# Altium PCB Main.PcbDoc
Units mil, origin at the board's own origin, x right, y up, seen from the top; angles counter-clockwise.
Board outline 2170 x 3350 mil, 2 copper layers (Top Layer, Bottom Layer); 11 components, 45 nets, 71 pads, 0 vias.
Unrouted connection lines stored in the file: 1.
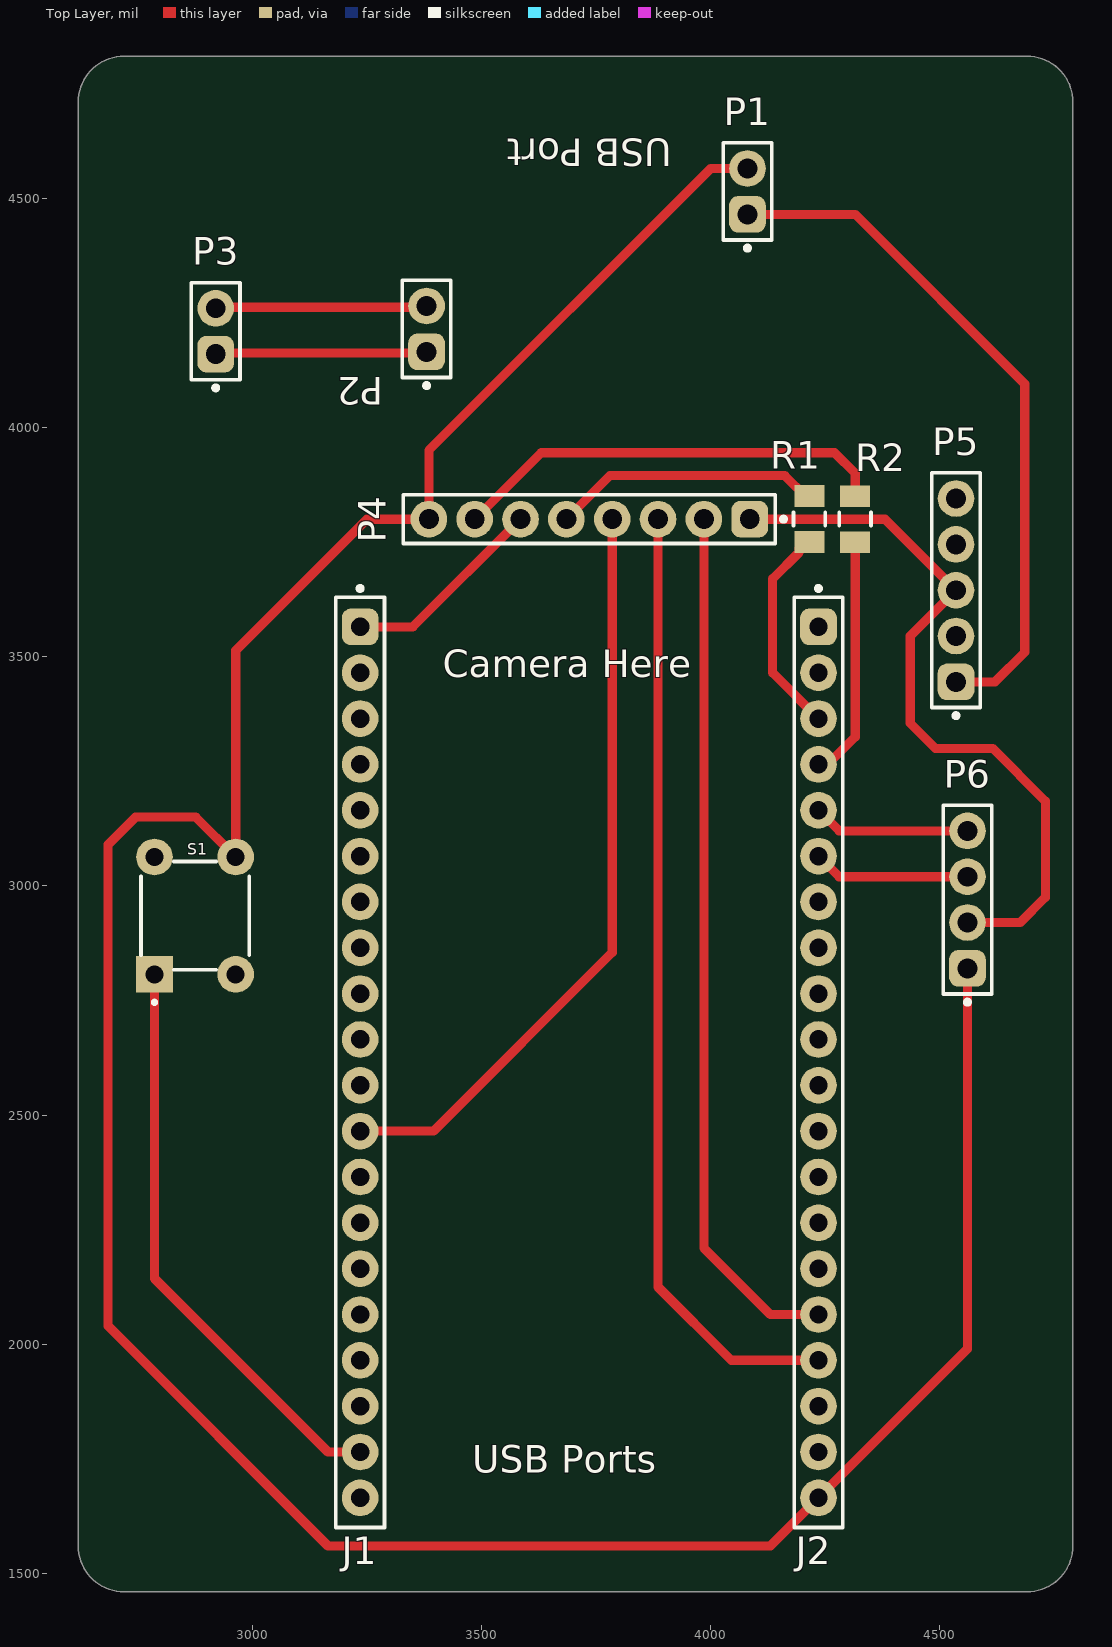
[diagram p0: Top Layer view]
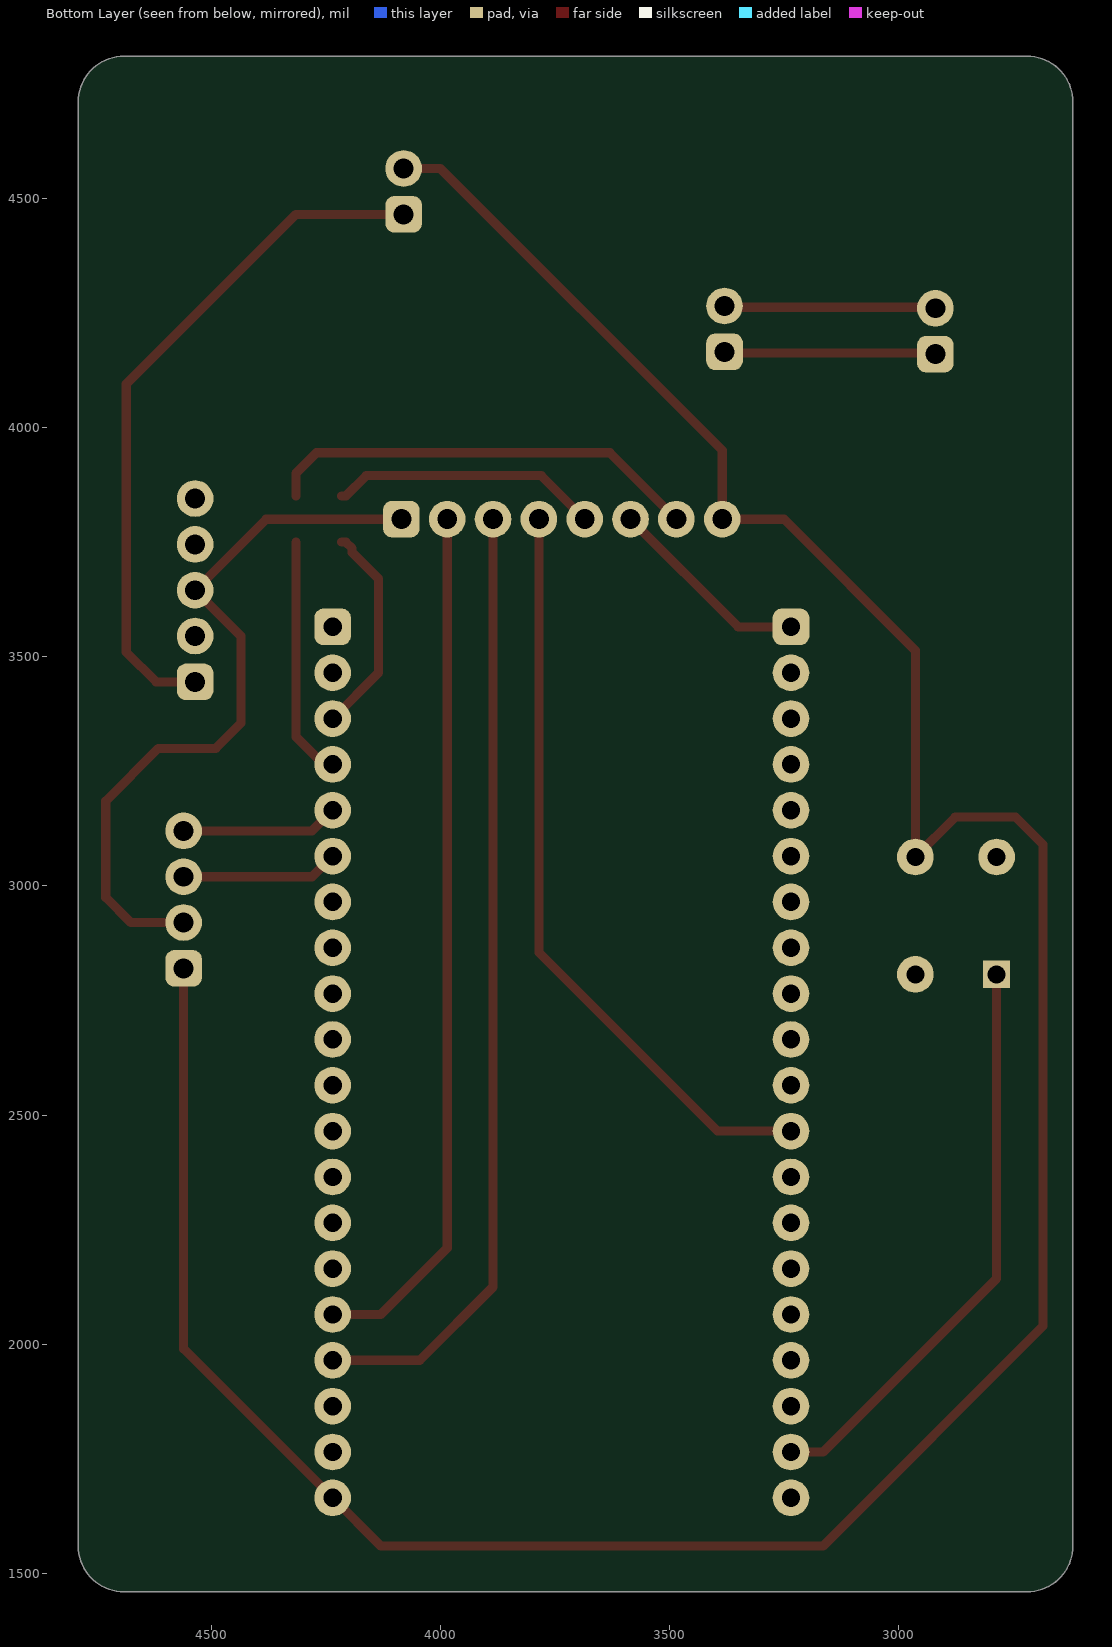
[diagram p1: Bottom Layer view, seen from below]
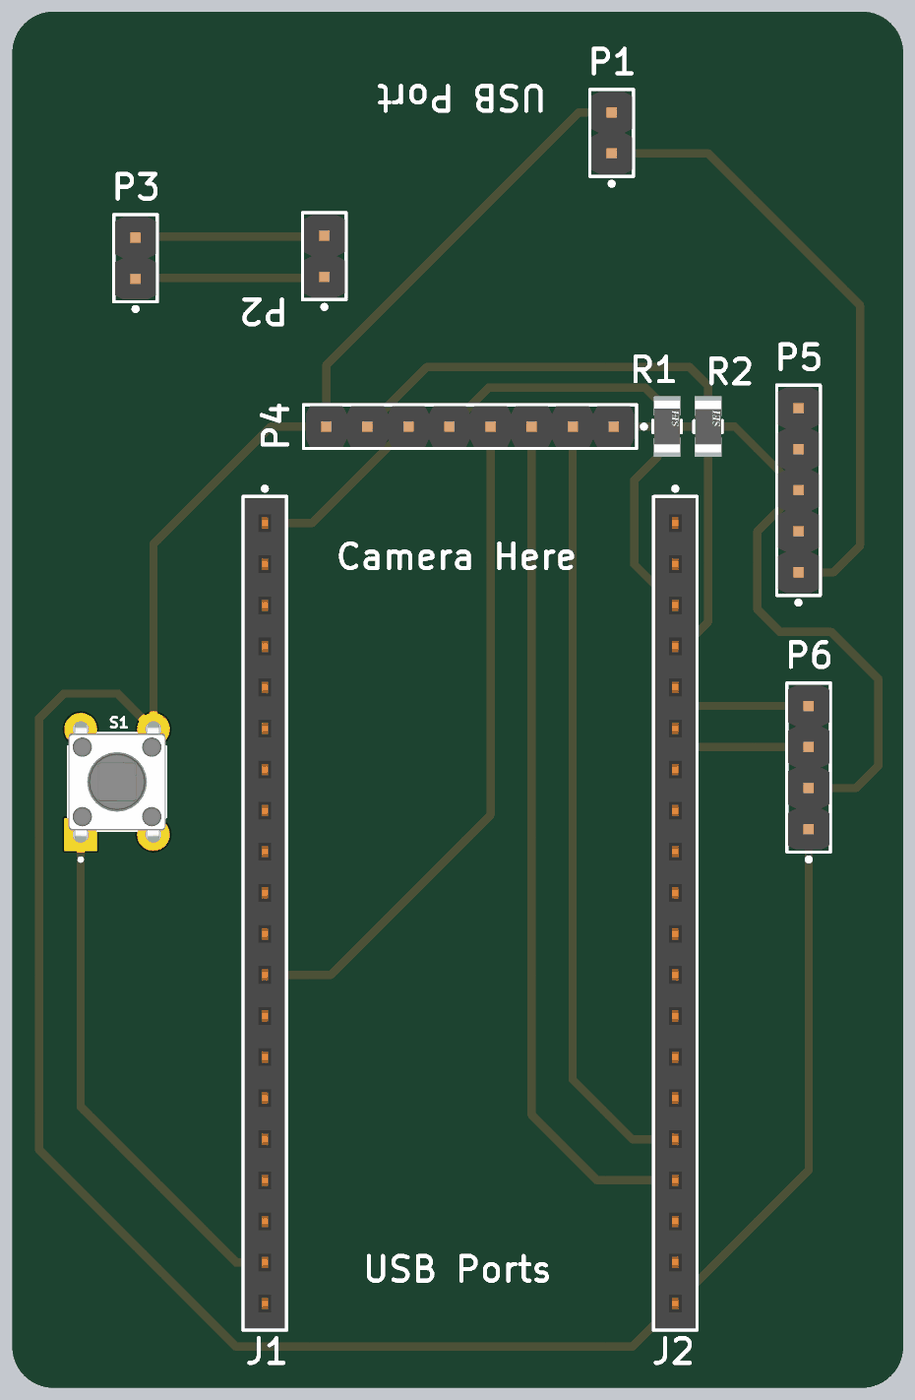
[diagram p2: 3D render of the assembled board from above, using the file's embedded part models]

## Layer stack, top to bottom
Top Solder: solder mask 0.4, Solder Resist, Dk 3.5
Top Layer: signal copper 1.4
Dielectric 1: dielectric 12.6, FR-4, Dk 4.8
Bottom Layer: signal copper 1.4
Bottom Solder: solder mask 0.4, Solder Resist, Dk 3.5

## Board outline
2620,1560 2620,4710 cw(c2720,4710) 2720,4810 4690,4810 cw(c4690,4710) 4790,4710 4790,1560 cw(c4690,1560) 4690,1460 2720,1460 cw(c2720,1560)

## Design rules (kind name [scope] priority, off if disabled: settings)
Clearance [All] p1: gap=10 ignorepadtopadclearanceinfootprint=FALSE
PolygonConnect [All] p1: connectstyle=Relief reliefconductorwidth=10 reliefentries=4 polygonreliefangle="90 Angle" airgapwidth=10
RoutingVias [All] p1: holewidth=28 width=50 viastyle="Through Hole" minholewidth=28 minwidth=50 maxholewidth=28 maxwidth=50
SolderMaskExpansion [All] p1: expansion=4 istentingtop=FALSE
SupplyNets "Schematic Supply Nets" [InNet('3V3_Pre')] p1: voltage=0.000
SupplyNets "Schematic Supply Nets_3" [InNet('RES')] p2: voltage=0.000
SupplyNets "Schematic Supply Nets_2" [InNet('GND')] p3: voltage=0.000
SupplyNets "Schematic Supply Nets_1" [InNet('5V0')] p4: voltage=0.000
Width [All] p1: maxlimit=20 minlimit=20 preferedwidth=20 minimp=50.000000 maximp=50.000000 favimp=50.000000
30 further rules are at their usual default settings.

## Classes and differential pairs
component class Main: J1 J2 P1 P2 P5 P6 R1 R2 S1

## Components (designator, comment, footprint, x,y, rotation, side; value= is the part's Value field where it differs from the comment)
J1 "61302011821" 61302011821 3235,2615 r270 top
J2 "61302011821" 61302011821 4235,2615 r270 top
P1 "61300211121" 61300211121 4080,4515 r90 top
P2 "61300211121" 61300211121 3380,4215 r90 top
P3 "61300211121" 61300211121 2920,4210 r90 top
P4 "61300811121" 61300811121 3735,3800 r180 top
P5 "61300511121" 61300511121 4535,3645 r90 top
P6 "61300411121" 61300411121 4560,2970 r90 top
R1 "0" FP-RMCF1206-IPC_C 4215,3800.22 r90 top
R2 "0" FP-RMCF1206-IPC_C 4315,3800 r90 top
S1 "SWT0325-073016TSK_REVA" SW_SWT0325-073016TSK_REVA 2875,2935 r90 top

## Footprints (in the part's own frame and the unit in brackets; to place one, negate y for a bottom-side part, rotate by r counter-clockwise, add the part's x,y. Pads: shape width x height; smd on the part's side, far side on the other; paste and mask are expansions set on the pad)
61300211121 [mil] "Pin Header, pitch 2.54 mm, THT, Vertical, single row, 2p"
  rrect50% 80x80 hole 43.31: 1(-50,0)
  round 80 hole 43.31: 2(50,0)
  silkscreen extent -129,-53 106,53, body extent -100,-50 100,50, height 337
61300411121 [mil] "Pin Header, pitch 2.54 mm, THT, Vertical, single row, 4p"
  rrect50% 80x80 hole 43.31: 1(-150,0)
  round 80 hole 43.31: 2(-50,0) 3(50,0) 4(150,0)
  silkscreen extent -229,-53 206,53, body extent -200,-50 200,50, height 337
61300511121 [mil] "Pin Header, pitch 2.54 mm, THT, Vertical, single row, 5p"
  rrect50% 80x80 hole 43.31: 1(-200,0)
  round 80 hole 43.31: 2(-100,0) 3(0,0) 4(100,0) 5(200,0)
  silkscreen extent -279,-53 256,53, body extent -250,-50 250,50, height 337
61300811121 [mil] "Pin Header, pitch 2.54 mm, THT, Vertical, single row, 8p"
  rrect50% 80x80 hole 43.31: 1(-350,0)
  round 80 hole 43.31: 2(-250,0) 3(-150,0) 4(-50,0) 5(50,0) 6(150,0) 7(250,0) 8(350,0)
  silkscreen extent -429,-53 406,53, body extent -400,-50 400,50, height 337
61302011821 [mil] "Socket Header, Pitch 2.54 mm, THT, Vertical, single row, 20p"
  rrect50% 80x80 hole 40.16: 1(-950,0)
  round 80 hole 40.16: 2(-850,0) 3(-750,0) 4(-650,0) 5(-550,0) 6(-450,0) 7(-350,0) 8(-250,0) 9(-150,0) 10(-50,0) 11(50,0) 12(150,0) 13(250,0) 14(350,0) 15(450,0) 16(550,0) 17(650,0) 18(750,0) 19(850,0) 20(950,0)
  silkscreen extent -1039,-53 1015,53, body extent -1010,-49 1010,49, height 337
FP-RMCF1206-IPC_C [mil]
  rect 47.39x65.28 smd paste+0 mask+0: 1(-50.22,0) 2(50.22,0)
  silkscreen extent -15,-34 15,34, body extent -78,-38 78,38, height 10
SW_SWT0325-073016TSK_REVA [mm]
  rect 2.032x2.032 / inner round 1.508 / far side rect 1.508x1.508 hole 1 mask+0.102: 1(-3.25,2.25)
  round 2.032 hole 1 mask+0.102: 2(3.25,2.25) 3(-3.25,-2.25) 4(3.25,-2.25)
  silkscreen extent -4.9,-3 3,3, body extent -3.95,-3 3.95,3, height 7.3

## Part data
J1 J2: library part CMP-1502-01348-4, "THT Vertical Socket Header WR-PHD, Pitch 2.54 mm, Single Row, 20 pins", Contact Resistance=20mΩ, Current Rating=3A, Operating Supply Voltage=250V, Gender=Female, Lead Pitch=2.54mm, Number of Pins=20, Orientation=Vertical
P1 P2 P3: library part CMP-1712-00002-7, "THT Vertical Pin Header WR-PHD, Pitch 2.54 mm, Single Row, 2 pins", Color=Black, Contact Resistance=20mΩ, Current Rating=3A, Max Operating Temperature=105°C, Min Operating Temperature=-40°C, Operating Supply Voltage=250V, Connector Type="Male Pin", Contact Gender=Male, Contact Material=Gold, Contact Mating Length=5.9944mm, Contact Plating=Gold, Gender=Male, Height=8.94mm, Housing Material=PBT, Lead Free="Lead Free", Lead Pitch=2.54mm, Mount="Through Hole", Number of Contacts=2, Number of Pins=2, Number of Positions=2, Number of Rows=1, Orientation=Vertical, Packaging=Bulk, Pitch=2.54mm, REACH SVHC=No, RoHS=Compliant, Termination="Through Hole", Voltage Rating=250V
P4: library part CMP-1502-01076-4, "THT Vertical Pin Header WR-PHD, Pitch 2.54 mm, Single Row, 8 pins", Color=Black, Contact Resistance=20mΩ, Current Rating=3A, Max Operating Temperature=105°C, Min Operating Temperature=-40°C, Operating Supply Voltage=250V, Connector Type="Male Pin", Contact Material=Gold, Contact Mating Length=5.9944mm, Contact Plating=Gold, Gender=Male, Height=8.54mm, Lead Pitch=2.54mm, Mount="Through Hole", Number of Contacts=8, Number of Pins=8, Number of Positions=8, Number of Rows=1, Orientation=Vertical, Packaging=Bulk, Pitch=2.54mm, RoHS=Compliant, Termination=Solder, Voltage Rating=250V
P5: library part CMP-1502-01068-4, "THT Vertical Pin Header WR-PHD, Pitch 2.54 mm, Single Row, 5 pins", Color=Black, Contact Resistance=20mΩ, Current Rating=3A, Max Operating Temperature=105°C, Min Operating Temperature=-40°C, Operating Supply Voltage=250V, Connector Type="Male Pin", Contact Material=Gold, Contact Mating Length=5.9944mm, Contact Plating=Gold, Gender=Male, Height=8.89mm, Lead Free="Lead Free", Lead Pitch=2.54mm, Mount="Through Hole", Number of Contacts=5, Number of Pins=5, Number of Positions=5, Number of Rows=1, Orientation=Vertical, Packaging=Bulk, Pitch=2.54mm, RoHS=Compliant, Termination=Solder, Voltage Rating=250V
P6: library part CMP-1502-01064-4, "THT Vertical Pin Header WR-PHD, Pitch 2.54 mm, Single Row, 4 pins", Color=Black, Contact Resistance=20mΩ, Current Rating=3A, Max Operating Temperature=105°C, Min Operating Temperature=-40°C, Operating Supply Voltage=250V, Connector Type="Male Pin", Contact Material=Gold, Contact Mating Length=5.9944mm, Contact Plating=Gold, Gender=Male, Height=8.89mm, Lead Free="Lead Free", Lead Pitch=2.54mm, Mount="Through Hole", Number of Contacts=4, Number of Pins=4, Number of Positions=4, Number of Rows=1, Orientation=Vertical, Packaging=Bulk, Pitch=2.54mm, RoHS=Compliant, Termination=Solder, Voltage Rating=250V
R1 R2: library part CMP-26527-003312-1, "2.21kΩ ±1% 0.25W 1206 Thick Film Chip Resistor AEC-Q200 compliant", Case/Package=1206, Max Operating Temperature=155°C, Max Power Dissipation=250mW, Min Operating Temperature=-55°C, Package Quantity=10000, Resistance=2.21kR, Resistor Type="Thick Film", Temperature Coefficient=100ppm/°C, Tolerance=1%, Features="Automotive AEC-Q200", Height=0.028inch, Length=0.126inch, Mount="Surface Mount", Number of Terminations=2, Packaging="Tape and Reel", RoHS Compliant=Yes, Series=RMCF, Width=0.063inch
S1: "6mm x 6mm Through Hole Tactile Switch", Package=None, Check_prices=https://www.snapeda.com/parts/SWT0325-073016TSK/Global+Connector+Technology/view-part/?ref=eda, MF="Global Connector Technology", MP=SWT0325-073016TSK, SnapEDA_Link=https://www.snapeda.com/parts/SWT0325-073016TSK/Global+Connector+Technology/view-part/?ref=snap

## Nets (pads, with @x,y where several pads share a name; then routed paths per layer and width w, separated by ;. In a path a pad name is that pad's centre, name@x,y a point inside that pad or via, vN(x,y) a via of type N, cw(c..) or ccw(c..) an arc to the next point about the centre after c; other vN are vias at no path point)
3V3_Pre: P1.1 P5.1 | length 1520.2
  Top Layer w20: P1.1 4315,4465 4685,4095 4685,3510 4620,3445 P5.1
5V0: J1.20
B+: P2.1 P3.1 | length 462.1
  Top Layer w20: P3.1 2922.5,4162.5 3377.5,4162.5 P2.1
B-: P2.2 P3.2 | length 462.1
  Top Layer w20: P3.2 2922.5,4262.5 3377.5,4262.5 P2.2
BOOT: J2.13
CAM_HREF: J1.6
CAM_PCLK: J1.18
CAM_SIOC: J1.4
CAM_SIOD: J1.3
CAM_VYSNC: J1.5
CAM_XCLK: J1.7
CAM_Y2: J1.16
CAM_Y3: J1.14
CAM_Y4: J1.11
CAM_Y5: J1.15
CAM_Y6: J1.17
CAM_Y7: J1.10
CAM_Y8: J1.9
CAM_Y9: J1.8
D+: J2.19
D-: J2.18
DISP_BKL: J2.4 R2.1 | length 529.6
  Top Layer w20: J2.4 4242.62,3272.62 4262.62,3272.62 4315,3325 R2.1
DISP_CS: J1.12 P4.4 | length 1656.5
  Top Layer w20: J1.12 3395,2465 3785,2855 P4.4
DISP_DC: J2.3 R1.1 | length 464.8
  Top Layer w20: R1.1 4206.05,3750 4192.36,3736.3 4192.36,3727.36 4135,3670 4135,3465 J2.3
DISP_MOSI: J2.16 P4.2 | length 1900.1
  Top Layer w20: P4.2 3985,2210 4130,2065 J2.16
DISP_SCLK: J2.17 P4.3 | length 2091.3
  Top Layer w20: P4.3 3885,2125 4045,1965 J2.17
GND: J2.20 P1.2 P4.8 P6.1 S1.4 | length 6561.9
  Top Layer w20: P1.2 4000,4565 3385,3950 P4.8 3250,3800 2963.58,3513.58 S1.4 2876.54,3150 2745,3150 2685,3090 2685,2040 3165,1560 4130,1560 J2.20 4560,1990 P6.1
LOG: J1.13
NetP4_5: P4.5 R1.2 | length 587.8
  Top Layer w20: P4.5 3780,3895 4161.5,3895 4206.05,3850.44 R1.2
NetP4_7: P4.7 R2.2 | length 958.5
  Top Layer w20: P4.7 3630,3945 4270,3945 4315,3900 R2.2
PSRAM_35: J2.12
PSRAM_36: J2.11
PSRAM_37: J2.10
RES: J1.1 P4.1 P4.6 P5.3 P6.2 | length 2059.8
  Top Layer w20: J1.1 3350,3565 P4.6 ; P4.1 4380,3800 P5.3 ; P5.3@4534.02,3644.02 4435,3545 4435,3355 4490,3300 4615,3300 4730,3185 4730,2975 4675,2920 P6.2
RST: J1.2
RTC_SCL: J2.5 P6.4 | length 343.6
  Top Layer w20: J2.5 4280,3120 P6.4
RTC_SDA: J2.6 P6.3 | length 343.6
  Top Layer w20: J2.6 4280,3020 P6.3
RX: J2.2
SD_CLK: J2.8
SD_CMD: J2.9
SD_DATA: J2.7
SHUTTER: J1.19 S1.1 | length 1268.9
  Top Layer w20: S1.1 2786.42,2143.58 3165,1765 J1.19
TX: J2.1
VSPI: J2.14
WS2812: J2.15
pads on no net: P5.2 P5.4 P5.5 S1.2 S1.3

## Silkscreen, mask and mechanical layers (free items; w line width, h text height)
Top Overlay:
  text "USB Port" at 3914.93,4629.99 h60 r180
  text "Camera Here" at 3415.1,3455.01 h60
  text "USB Ports" at 3480.08,1720.01 h60
Mechanical 1:
  the board outline again, w10